# Altium PCB EtherIOv3_2.PcbDoc (part 2 of 2)
Units mil, origin at the board's own origin, x right, y up, seen from the top; angles counter-clockwise.
Board outline 4380 x 2544.37 mil, 2 copper layers (Top Layer, Bottom Layer), stack 63.824 mil thick; 111 components, 138 nets, 525 pads, 210 vias.
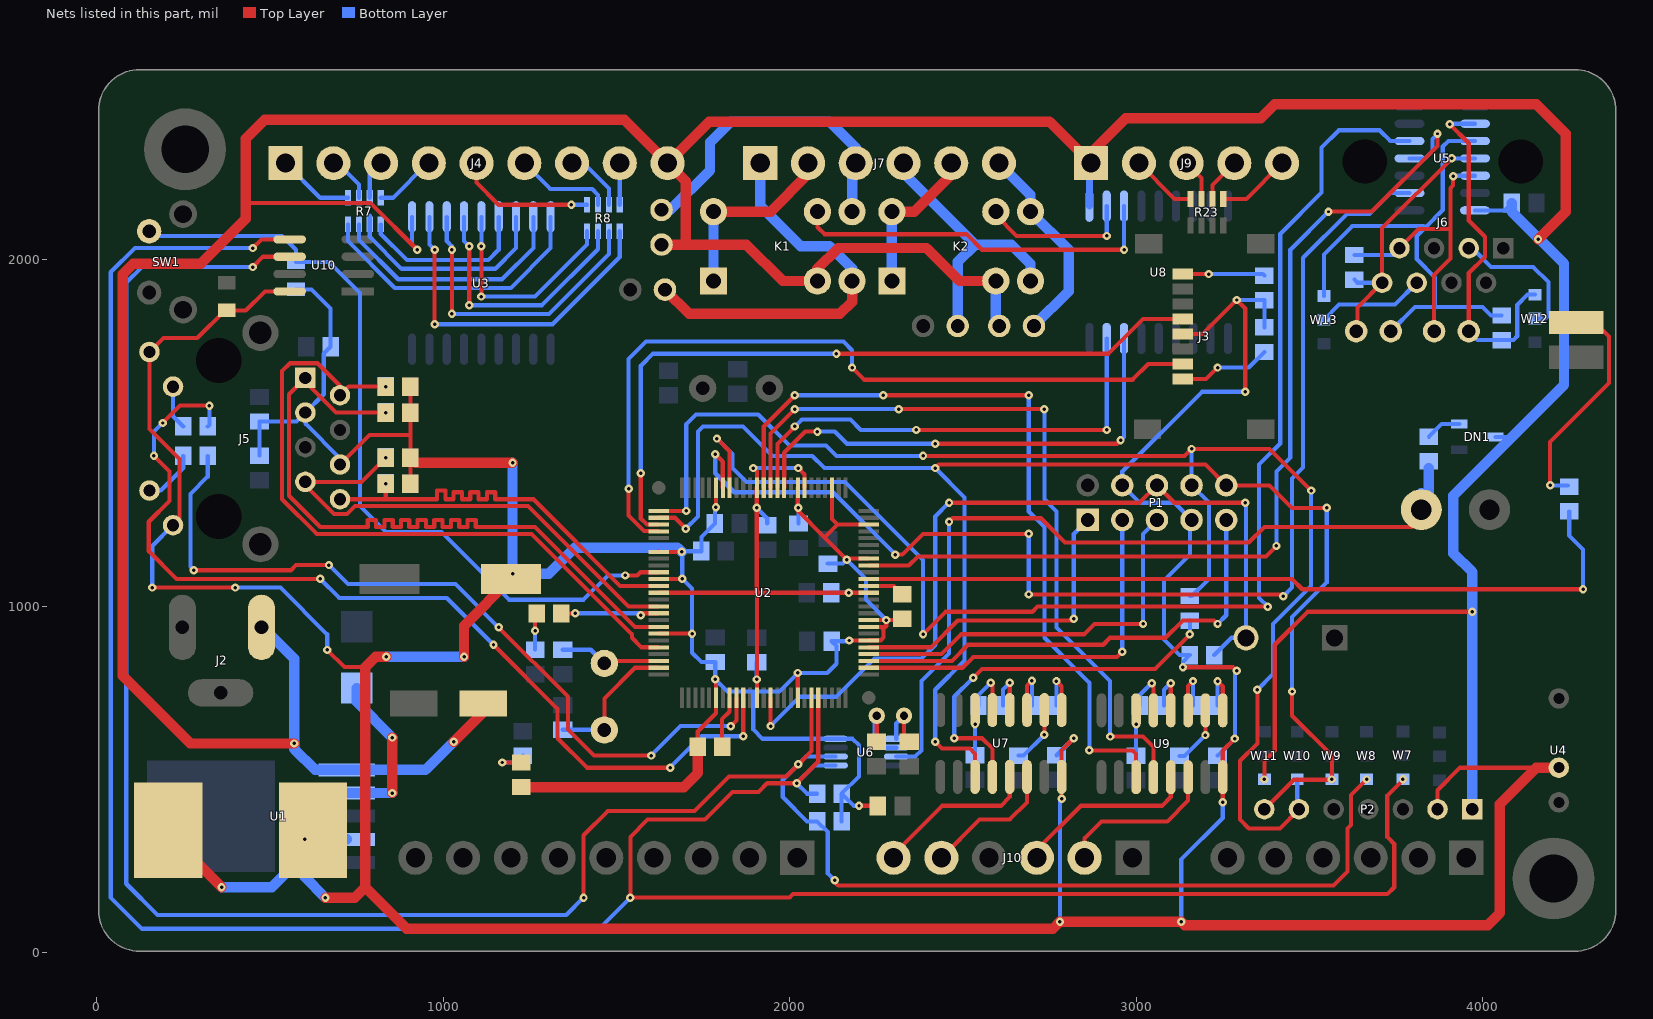
[diagram p2: the nets of this part, all layers, seen from the top]

## Via types
v1: diameter 24, hole 10, Top Layer to Bottom Layer, 202 vias
v2: diameter 24, hole 8, Top Layer to Bottom Layer, 7 vias
v3: diameter 59.06, hole 35.43, Top Layer to Bottom Layer, 1 vias

## Nets (pads, with @x,y where several pads share a name; then routed paths per layer and width w, separated by ;. In a path a pad name is that pad's centre, name@x,y a point inside that pad or via, vN(x,y) a via of type N, cw(c..) or ccw(c..) an arc to the next point about the centre after c; other vN are vias at no path point) (continued)
NetC9_2: C9.2 U2.48 X2.1 | length 296.1
  Top Layer w12: X2.1@1465,835.51 1472.09,842.6 U2.48@1621.85,842.6
  Bottom Layer w12: C9.2@1345,874.88 1425.63,874.88 X2.1@1465,835.51
NetC10_2: C10.2 U2.49 X2.2 | length 404.8
  Top Layer w12: X2.2@1465,643.39 1465,734.45 1553.46,822.91 U2.49@1621.85,822.91
  Bottom Layer w12: C10.2@1345,644.02 1464.37,644.02 X2.2@1465,643.39
NetC20_2: C20.2 C21.2 C22.2 U2.7 U2.14 U2.38 U2.62 U2.88 | length 1624.5
  Top Layer w12: U2.38@1621.85,1039.45 1905,1039.45 ; v1(1895,1399.45) 1905.32,1389.13 U2.14@1905.32,1342.6 1905,1342.28 v1(1905,1284.45) 1905,1039.45 ; U2.62@1905.32,736.3 v1(1905.32,789.13) 1905.32,1039.13 1905,1039.45 ; v1(2025,1399.45) 2043.11,1381.34 U2.7@2043.11,1342.6 ; U2.88@2228.15,1039.45 v1(2170,1039.45) 1905,1039.45
  Bottom Layer w12: v1(1895,1399.45) v1(2025,1399.45) ; v1@1905,789.45 C22.2@1905,838.58 ; v1(1905,1284.45) 1935,1254.45 C21.2@1935,1239.88 ; C20.2@2120,1039.45 v1(2170,1039.45)
NetC24_2: C24.2 R21.2 U6.3 | length 2397.9
  Top Layer w12: v1(2460,1244.45) 2470,1254.45 2725,1254.45 2795,1184.45 3325,1184.45 3370,1229.45 3795,1229.45 3823.15,1257.6 C24.2@3823.15,1279.45
  Bottom Layer w12: U6.3@2307.6,566.65 2362.2,566.65 2380,584.45 2380,784.45 2460,864.45 v1(2460,1244.45)
  Bottom Layer w30: C24.2@3823.15,1327.17 C24.2@3823.15,1279.45 3844.57,1300.87 R21.2@3844.57,1399.45
NetC25_2: C25.2 U6.1 X3.1 | length 156.7
  Top Layer w12: X3.1@2330,684.45 2330,624.88 C25.2@2345,609.88
  Bottom Layer w12: U6.1@2307.6,617.83 2307.6,662.05 X3.1@2330,684.45
NetC26_2: C26.2 U6.2 X3.2 | length 219.5
  Top Layer w12: C26.2@2250,609.88 2251.26,611.14 X3.2@2251.26,684.45
  Bottom Layer w12: X3.2@2251.26,684.45 2245,678.19 2245,614.45 2267.2,592.24 U6.2@2307.6,592.24
NetC29_1: C29.1 U7.3 | length 161.1
  Top Layer w12: U7.3@2685,700.91 2685,771.18 v1(2699.13,785.31)
  Bottom Layer w12: C29.1@2699.13,714.45 v1(2699.13,785.31)
NetC29_2: C29.2 U7.1 | length 159.8
  Top Layer w12: v1(2770,784.45) 2785,769.45 U7.1@2785,700.91
  Bottom Layer w12: C29.2@2770,714.45 v1(2770,784.45)
NetC30_1: C30.1 U7.2 | length 171.3
  Top Layer w12: v1(2735,629.45) U7.2@2735,700.91
  Bottom Layer w12: C30.1@2660,569.45 2675,569.45 v1(2735,629.45)
NetC31_1: C31.1 U7.4 | length 151.5
  Top Layer w12: U7.4@2635,700.91 v1(2635,779.45)
  Bottom Layer w12: C31.1@2615.87,714.45 2615.87,760.31 v1(2635,779.45)
NetC31_2: C31.2 U7.5 | length 160.1
  Top Layer w12: v1(2580,779.45) 2585,774.45 U7.5@2585,700.91
  Bottom Layer w12: C31.2@2545,714.45 2545,744.45 v1(2580,779.45)
NetC32_1: C32.1 U7.6 | length 130.6
  Top Layer w12: v1(2535,659.45) U7.6@2535,700.91
  Bottom Layer w12: C32.1@2535,570.31 v1(2535,659.45)
NetC34_1: C34.1 U9.3 | length 161.1
  Top Layer w12: U9.3@3150,700.04 3150,770.31 v1(3164.13,784.45)
  Bottom Layer w12: C34.1@3164.13,713.58 v1(3164.13,784.45)
NetC34_2: C34.2 U9.1 | length 159.8
  Top Layer w12: v1(3235,783.58) 3250,768.58 U9.1@3250,700.04
  Bottom Layer w12: C34.2@3235,713.58 v1(3235,783.58)
NetC35_1: C35.1 U9.2 | length 171.3
  Top Layer w12: v1(3200,628.58) U9.2@3200,700.04
  Bottom Layer w12: C35.1@3125,568.58 3140,568.58 v1(3200,628.58)
NetC36_1: C36.1 U9.4 | length 151.5
  Top Layer w12: U9.4@3100,700.04 v1(3100,778.58)
  Bottom Layer w12: C36.1@3080.87,713.58 3080.87,759.45 v1(3100,778.58)
NetC36_2: C36.2 U9.5 | length 160.1
  Top Layer w12: v1(3045,778.58) 3050,773.58 U9.5@3050,700.04
  Bottom Layer w12: C36.2@3010,713.58 3010,743.58 v1(3045,778.58)
NetC37_1: C37.1 U9.6 | length 130.6
  Top Layer w12: v1(3000,659.45) U9.6@3000,700.04
  Bottom Layer w12: C37.1@3000,569.45 v1(3000,659.45)
NetD1_2: D1.2 R1.2 | length 123.1
  Top Layer w12: v1(1170,549.45) D1.2@1225,549.45
  Bottom Layer w12: v1(1170,549.45) 1210.43,549.45 R1.2@1230,569.02
NetD2_2: D2.2 L1.1 U1.2 | length 1279.7
  Top Layer w30: L1.1@206.34,354.45 206.34,343.11 v1(360,189.45) ; v1(853.07,461.38) v1(853.07,621.38)
  Bottom Layer w30: v1(360,189.45) 505,189.45 550,234.45 550,404.45 606.93,461.38 U1.2@721.06,461.38 v1(853.07,461.38) ; D2.2@750,764.45 750,724.45 v1(853.07,621.38)
NetD3_A: D3.A R24.1 | length 662.9
  Top Layer w12: v1(4195,1349.45) 4195,1474.45 4365,1644.45 4365,1779.45 4325,1819.45 D3.A@4270,1819.45
  Bottom Layer w12: v1(4195,1349.45) R24.1@4245.87,1349.45
NetDN1_K: DN1.K R21.1 | length 103.1
  Bottom Layer w12: R21.1@3845,1489.88 3881.97,1526.85 DN1.K@3932.76,1526.85
NetJ3_1: J3.1 R2.1 | length 267.4
  Top Layer w12: J3.1@3135,1656.14 3201.69,1656.14 v1(3235,1689.45)
  Bottom Layer w12: v1(3235,1689.45) 3325,1689.45 R2.1@3370,1734.45
NetJ3_8: J3.8 R5.1 | length 236.8
  Top Layer w12: J3.8@3135,1959.29 v1(3209.84,1959.29)
  Bottom Layer w12: v1(3209.84,1959.29) 3365.59,1959.29 R5.1@3370,1954.88
NetJ4_1: J4.1 R7.1 | length 221.4
  Bottom Layer w12: J4.1@545,2279.45 645,2179.45 R7.1@725,2179.45
NetJ4_2: J4.2 R7.2 | length 137.7
  Bottom Layer w12: J4.2@682.8,2279.45 695,2279.45 756.5,2217.95 R7.2@756.5,2179.45
NetJ4_3: J4.3 R7.3 | length 113.5
  Bottom Layer w12: R7.3@787.99,2179.45 787.99,2246.85 J4.3@820.59,2279.45
NetJ4_4: J4.4 R7.4 | length 216.9
  Bottom Layer w12: R7.4@819.49,2179.45 855,2179.45 955,2279.45 J4.4@958.39,2279.45 J4.4@995,2279.45
NetJ4_5: J4.5 R8.1 | length 401.4
  Top Layer w12: J4.5@1096.18,2279.45 1096.18,2223.27 1160,2159.45 v1(1370,2159.45)
  Bottom Layer w12: v1(1370,2159.45) R8.1@1415,2159.45
NetJ4_6: J4.6 R8.2 | length 297.3
  Bottom Layer w12: J4.6@1233.98,2279.45 1308.98,2204.45 1430,2204.45 1446.5,2187.95 R8.2@1446.5,2159.45 R8.2@1446.5,2177.83
NetJ4_7: J4.7 R8.3 | length 183.5
  Bottom Layer w12: J4.7@1371.77,2279.45 1405,2279.45 1477.99,2206.46 R8.3@1477.99,2159.45
NetJ4_8: J4.8 R8.4 | length 120
  Bottom Layer w12: R8.4@1509.49,2159.45 1509.49,2279.37 J4.8@1509.57,2279.45
NetJ5_P10: J5.P10 R10.2 | length 127.2
  Bottom Layer w12: J5.P10@220,1634.45 220,1549.02 R10.2@249.57,1519.45
NetJ5_P11: J5.P11 R9.2 | length 159.7
  Bottom Layer w12: J5.P11@152,1334.45 184.57,1334.45 249.57,1399.45 249.57,1434.02 R9.2@249.13,1434.45
NetJ6_3: J6.3 W12.2 | length 409.4
  Bottom Layer w12: J6.3@3960,2034.21 3970.14,2034.21 4024.36,1980 4146,1980 4190,1936 4190,1840 4181.05,1831.05 W12.2@4151,1831.05
NetJ6_6: J6.6 W13.2 | length 312.4
  Bottom Layer w12: W13.2@3542,1827.05 3585.95,1871 3746.79,1871 J6.6@3810,1934.21
NetJ7_1: J7.1 K1.NC W4.1 | length 1141.7
  Top Layer w30: W4.1@1640,1914.45 1710,1844.45 2145,1844.45 2180,1879.45 K1.NC@2180,1939.45
  Bottom Layer w30: J7.1@1915,2279.45 1915,2156.77 2032.33,2039.45 2115,2039.45 2180,1974.45 K1.NC@2180,1939.45
NetJ7_2: J7.2 K1.COM1 K1.COM2 | length 549.7
  Top Layer w30: K1.COM2@1780,2139.45 1945,2139.45 2052.8,2247.24 J7.2@2052.8,2279.45
  Bottom Layer w30: K1.COM1@1780,1939.45 K1.COM2@1780,2139.45
NetJ7_3: J7.3 K1.NO W3.1 | length 953.2
  Bottom Layer w30: W3.1@1630,2144.45 1655,2144.45 1770,2259.45 1770,2339.45 1830,2399.45 2115,2399.45 2190.59,2323.86 J7.3@2190.59,2279.45 2180,2268.86 K1.NO@2180,2139.45 K1.NO@2180,2119.45
NetJ7_4: J7.4 K2.NC W5.1 | length 809.1
  Bottom Layer w30: J7.4@2328.39,2279.45 2328.39,2251.06 2535,2044.45 ; W5.1@2485,1809.45 2485,1994.45 2535,2044.45 ; K2.NC@2695,1939.45 2695,1989.45 2640,2044.45 2535,2044.45
NetJ7_5: J7.5 K2.COM1 K2.COM2 | length 449
  Top Layer w30: K2.COM2@2295,2139.45 2360,2139.45 2466.18,2245.63 J7.5@2466.18,2279.45
  Bottom Layer w30: K2.COM1@2295,1939.45 K2.COM2@2295,2139.45
NetJ7_6: J7.6 K2.NO W6.1 | length 594.7
  Bottom Layer w30: J7.6@2603.98,2279.45 2695,2188.43 K2.NO@2695,2139.45 2805,2029.45 2805,1909.45 W6.1@2705,1809.45
NetJ9_2: J9.2 R23.4 | length 192
  Top Layer w12: J9.2@3007.8,2279.45 3111.02,2176.22 R23.4@3157.01,2176.22
NetJ9_3: J9.3 R23.3 | length 121
  Top Layer w12: J9.3@3145.59,2279.45 3188.5,2236.54 R23.3@3188.5,2176.22
NetJ9_4: J9.4 R23.2 | length 129.5
  Top Layer w12: R23.2@3220,2176.22 3220,2216.06 J9.4@3283.39,2279.45
NetJ9_5: J9.5 R23.1 | length 212.4
  Top Layer w12: R23.1@3251.5,2176.22 3317.95,2176.22 J9.5@3421.18,2279.45
NetK1_COIL2: K1.COIL2 U8.12 | length 1082.9
  Top Layer w12: K1.COIL2@2080,2139.45 2080,2094.45 2100,2074.45 2510,2074.45 2555,2029.45 v1(2965,2029.45)
  Bottom Layer w12: v1(2965,2029.45) U8.12@2965,2155.39
NetK2_COIL2: K2.COIL2 U8.11 | length 440.8
  Top Layer w12: K2.COIL2@2595,2139.45 2595,2129.45 2655,2069.45 v1(2915,2069.45)
  Bottom Layer w12: v1(2915,2069.45) U8.11@2915,2155.39
NetR7_5: R7.5 U3.15 | length 506.9
  Bottom Layer w12: R7.5@819.49,2102.68 819.49,2074.96 895,1999.45 1130,1999.45 1160,2029.45 U3.15@1160,2124.45
NetR7_6: R7.6 U3.16 | length 636
  Bottom Layer w12: 787.99,2127.44 R7.6@787.99,2102.68 787.99,2066.46 880,1974.45 1150,1974.45 1210,2034.45 U3.16@1210,2124.45
NetR7_7: R7.7 U3.17 | length 722.5
  Bottom Layer w12: R7.7@756.5,2102.68 756.5,2057.95 870,1944.45 1170,1944.45 1260,2034.45 U3.17@1260,2124.45
NetR7_8: R7.8 U3.18 | length 826.8
  Bottom Layer w12: R7.8@725,2102.68 725,2054.45 860,1919.45 1195,1919.45 1310,2034.45 U3.18@1310,2124.45
NetR8_5: R8.5 U3.11 | length 1005
  Top Layer w12: v1(975,1814.45) v1(975,2029.45)
  Bottom Layer w12: U3.11@960,2124.45 960,2044.45 v1(975,2029.45) ; v1(975,1814.45) 1315,1814.45 1509.49,2008.94 R8.5@1509.49,2082.68
NetR8_6: R8.6 U3.12 | length 876.1
  Top Layer w12: v1(1025,1844.45) v1(1025,2029.45)
  Bottom Layer w12: U3.12@1010,2124.45 1010,2054.45 1025,2039.45 v1(1025,2029.45) ; v1(1025,1844.45) 1305,1844.45 1477.99,2017.44 R8.6@1477.99,2082.68
NetR8_7: R8.7 U3.13 | length 751.3
  Top Layer w12: v1(1075,1869.45) v1(1075,2039.45)
  Bottom Layer w12: U3.13@1060,2124.45 1060,2054.45 v1(1075,2039.45) ; v1(1075,1869.45) 1285,1869.45 1446.5,2030.94 R8.7@1446.5,2082.68
NetR8_8: R8.8 U3.14 | length 635.4
  Top Layer w12: v1(1110,1894.45) v1(1110,2039.45)
  Bottom Layer w12: v1(1110,1894.45) 1265,1894.45 1415,2044.45 R8.8@1415,2082.68 ; v1(1110,2039.45) U3.14@1110,2124.45
NetR9_1: R9.1 U2.59 | length 2318.3
  Top Layer w12: v1(280,1104.45) 560,1104.45 575,1119.45 v1(670,1119.45) ; v1(1160,939.45) 1360,739.45 1360,644.45 1435,569.45 v1(1600,569.45) ; v1(1830,654.45) 1846.26,670.71 U2.59@1846.26,736.3
  Bottom Layer w12: v1(280,1104.45) 270,1114.45 270,1324.45 320,1374.45 R9.1@320,1434.45 ; v1(670,1119.45) 725,1064.45 1035,1064.45 v1(1160,939.45) ; v1(1600,569.45) 1685,654.45 v1(1830,654.45)
NetR10_1: R10.1 U2.60 | length 2814.6
  Top Layer w12: v1(165,1434.45) 210,1389.45 210,1304.45 150,1244.45 150,1159.45 230,1079.45 v1(645,1079.45) ; v1(190,1529.45) 240,1579.45 v1(325,1579.45) ; v1(1145,889.45) 1330,704.45 1330,619.45 1415,534.45 v1(1655,534.45) ; v1(1865.94,625.39) U2.60@1865.94,736.3
  Bottom Layer w12: v1(165,1434.45) 165,1504.45 v1(190,1529.45) ; R10.1@320.43,1519.45 325,1524.02 v1(325,1579.45) ; v1(645,1079.45) 700,1024.45 1010,1024.45 v1(1145,889.45) ; v1(1655,534.45) 1745.94,625.39 v1(1865.94,625.39)
NetR11_1: R11.1 U2.58 | length 150.4
  Top Layer w12: R11.1@1805,594.88 1805,674.45 1826.57,696.02 U2.58@1826.57,736.3
NetR14_2: R14.2 R15.1 | length 106
  Top Layer w12: v1(1265,929.45) 1265,974.88 R15.1@1269.57,979.45
  Bottom Layer w12: R14.2@1265,875.31 v1(1265,929.45)
NetR15_2: R15.2 U2.41 | length 298.4
  Top Layer w12: R15.2@1341.38,980.39 R15.2@1340.43,979.45 1380,979.45 v1(1380.94,980.39) ; v1(1570,974.45) 1570,976.34 1574.06,980.39 U2.41@1621.85,980.39
  Bottom Layer w12: v1(1380.94,980.39) 1574.06,980.39 1570,976.34 v1(1570,974.45)
NetR22_2: R22.2 U7.12 | length 1118
  Top Layer w12: v1(2475,619.45) 2555,619.45 2585,589.45 U7.12@2585,507.99 ; v1(2530,794.45) 2555,819.45 3055,819.45 v1(3155,919.45)
  Bottom Layer w12: v1(2475,619.45) 2475,739.45 v1(2530,794.45) ; v1(3155,919.45) R22.2@3155,959.02
R\S\T\: P1.6 R16.1 S1.2 U2.64 | length 2480.2
  Top Layer w12: v1(1944.68,654.76) U2.64@1944.68,736.3 ; v1(2460,1299.45) 3010,1299.45 P1.6@3060,1349.45 3110,1299.45 v1(3315,1299.45)
  Bottom Layer w12: v1(1944.68,654.76) 2029.37,739.45 2135,739.45 2245,849.45 2380,849.45 2420,889.45 2420,1259.45 v1(2460,1299.45) ; R16.1@3225.43,859.45 3275.43,909.45 S1.2@3317.05,909.45 3317.05,1297.4 v1(3315,1299.45)
REL0: U2.10 U8.7 | length 1413.9
  Top Layer w12: U2.10@1984.06,1342.6 1984.06,1443.5 2045,1504.45 v1(2080,1504.45) ; v1(2420,1469.45) 2945,1469.45 v1(2955,1479.45)
  Bottom Layer w12: v1(2080,1504.45) 2130,1504.45 2165,1469.45 v1(2420,1469.45) ; v1(2955,1479.45) 2965,1489.45 U8.7@2965,1773.5
REL1: U2.11 U8.8 | length 1382.6
  Top Layer w12: U2.11@1964.37,1342.6 1964.37,1468.82 v1(2015,1519.45) ; v1(2365,1509.45) 2835,1509.45 v1(2915,1509.45)
  Bottom Layer w12: v1(2015,1519.45) 2035,1539.45 2175,1539.45 2205,1509.45 v1(2365,1509.45) ; v1(2915,1509.45) U8.8@2915,1773.5
"RS485 DE": U2.92 U5.4 | length 2786.8
  Top Layer w12: U2.92@2228.15,1118.19 2343.74,1118.19 2370,1144.45 3375,1144.45 v1(3405,1174.45) ; v2(3555,2139.45) 3680,2139.45 3870,2329.45 v2(3870,2364.45)
  Bottom Layer w12: v1(3405,1174.45) 3405,1389.45 3445,1429.45 3445,2029.45 v2(3555,2139.45) ; U5.4@3789.13,2293.27 3833.82,2293.27 3855,2314.45 3855,2349.45 v2(3870,2364.45)
RX+: J6.7 R19.2 U5.12 W2.2 | length 842.2
  Top Layer w12: J6.7@3760,2034.21 3814.79,2089 3907,2089 ; W2.2@3860,1794.21 3860,1957 3907,2004 3907,2207 3914.92,2214.92 v1(3914.92,2241.97)
  Bottom Layer w12: R19.2@3630,2014.21 3740,2014.21 J6.7@3760,2034.21 ; v1(3914.92,2241.97) 3916.22,2243.27 U5.12@3978.11,2243.27
RX-: J6.8 R19.1 U5.11 W1.2 | length 794
  Top Layer w12: W1.2@3635,1794.21 3658.43,1794.21 3638.89,1813.74 3638.89,1863.11 J6.8@3710,1934.21 3710,2092.05 v1(3911.22,2293.27)
  Bottom Layer w12: R19.1@3630,1943.35 3639.13,1934.21 J6.8@3710,1934.21 ; v1(3911.22,2293.27) U5.11@3978.11,2293.27
RXIN: C7.1 J5.P8 R17.1 U2.37 | length 1238.9
  Top Layer w12: J5.P8@702,1309.45 835,1309.45 ; v1(834.13,1354.45) 834.13,1310.31 835,1309.45 ; U2.37@1621.85,1059.13 1510.32,1059.13 1260,1309.45 1150,1309.45 1150,1329.45 1126,1329.45 1126,1309.45 1102,1309.45 1102,1329.45 1078,1329.45 1078,1309.45 1054,1309.45 1054,1329.45 1030,1329.45 1030,1309.45 1006,1309.45 1006,1334.45 982,1334.45 982,1309.45 835,1309.45
RXIP: C8.1 J5.P7 R18.1 U2.40 | length 1454.4
  Top Layer w12: v1(834.13,1429.45) 764.13,1359.45 J5.P7@602,1359.45 602,1349.31 684.38,1266.92 722.47,1266.92 745,1289.45 1245,1289.45 1534.37,1000.08 U2.40@1621.85,1000.08
SCK: J3.5 U2.28 | length 2120.5
  Top Layer w12: v1(1570,1384.45) 1570,1254.02 1587.72,1236.3 U2.28@1621.85,1236.3 ; v1(2135,1729.45) 2920,1729.45 3019.92,1829.37 J3.5@3135,1829.37
  Bottom Layer w12: v1(1570,1384.45) 1570,1694.45 1605,1729.45 v1(2135,1729.45)
SCL: R3.1 U2.70 U6.6 U10.6 W8.3 | length 7037.1
  Top Layer w12: v1(450,1979.45) 480,2009.45 U10.6@556.57,2009.45 ; v1@1405,169.45 1405,339.45 1475,409.45 1725,409.45 1825,509.45 1990,509.45 v1(2025,544.45) 2062.8,582.24 U2.70@2062.8,736.3 ; v1@2130,204.45 2140,194.45 3570,194.45 3610,234.45 3610,359.45 3620,369.45 3620,455.55 v1(3665,500.55)
  Bottom Layer w12: v1(450,1979.45) 130,1979.45 85,1934.45 85,199.45 175,109.45 1355,109.45 v1(1405,159.45) ; v1(2130,209.45) 2110,229.45 2110,348.58 R3.1@2079.13,379.45 2050,379.45 1980,449.45 1980,499.45 v1(2025,544.45) 2047.2,566.65 U6.6@2132.4,566.65
"SD S\S\": J3.2 U2.29 | length 2272.2
  Top Layer w12: v1(1535,1339.45) 1535,1262.15 1579.85,1217.3 1621.17,1217.3 U2.29@1621.85,1216.61 ; v1(2180,1689.45) 2215,1654.45 2990,1654.45 3035,1699.45 J3.2@3135,1699.45
  Bottom Layer w12: v1(1535,1339.45) 1535,1714.45 1585,1764.45 2155,1764.45 2180,1739.45 v1(2180,1689.45)
SDA: R4.1 U2.71 U6.5 U10.5 W7.3 | length 7688.8
  Top Layer w12: v1(450,2034.45) 475,2059.45 U10.5@556.57,2059.45 ; U2.71@2082.48,736.3 2082.48,551.93 v1(2020,489.45) 1935,489.45 1910,464.45 1835,464.45 1755,384.45 1590,384.45 1540,334.45 v1(1540,159.45) 2000,159.45 2010,169.45 3725,169.45 3745,189.45 3745,314.45 3725,334.45 3725,454.45 3770,499.45 v1(3770,501.1)
  Bottom Layer w12: v1(450,2034.45) 110,2034.45 40,1964.45 40,159.45 130,69.45 1450,69.45 v1(1540,159.45) ; R4.1@2079.13,459.45 2050,459.45 v1(2020,489.45) 2071.61,541.06 U6.5@2132.4,541.06
STAT: R24.2 U2.90 | length 2315.6
  Top Layer w12: U2.90@2228.15,1078.82 3450,1078.82 3479.37,1049.45 v1(4290,1049.45)
  Bottom Layer w12: R24.2@4250,1274.45 4250,1204.45 4290,1164.45 v1(4290,1049.45)
T\R\S\T\: R6.1 U2.89 | length 106.9
  Top Layer w12: U2.89@2228.15,1059.13 2300.75,1059.13 R6.1@2325,1034.88
TCK: P1.1 U2.80 | length 927.6
  Top Layer w12: U2.80@2228.15,881.97 2407.52,881.97 2485,959.45 2815,959.45 v1(2820,964.45)
  Bottom Layer w12: v1(2820,964.45) 2820,1209.45 P1.1@2860,1249.45
TDI: P1.9 U2.78 | length 1369.7
  Top Layer w12: U2.78@2228.15,842.6 2468.15,842.6 2515,889.45 2905,889.45 2925,909.45 3085,909.45 3135,959.45 3225,959.45 v1(3235,949.45)
  Bottom Layer w12: v1(3235,949.45) 3260,974.45 P1.9@3260,1249.45
TDO: P1.3 U2.77 | length 1131.1
  Top Layer w12: U2.77@2228.15,822.91 2498.46,822.91 2530,854.45 2945,854.45 v1(2960,869.45)
  Bottom Layer w12: v1(2960,869.45) P1.3@2960,1249.45
TMS: P1.5 U2.79 | length 1144.5
  Top Layer w12: U2.79@2228.15,862.28 2437.83,862.28 2495,919.45 2850,919.45 2880,949.45 v1(3020,949.45)
  Bottom Layer w12: v1(3020,949.45) 3020,1209.45 P1.5@3060,1249.45
TX+: R20.1 U5.9 W2.1 W12.1 | length 1041.8
  Top Layer w12: v1(3904.92,2391.97) 3960,2336.89 3960,2114 4007,2067 4007,2009 3960,1962 W2.1@3960,1794.21
  Bottom Layer w12: v1(3904.92,2391.97) 3906.22,2393.27 U5.9@3978.11,2393.27 ; W2.1@3960,1794.21 3985.43,1768.78 R20.1@4055,1768.78 4088.78,1768.78 4100,1780 4100,1870 4129.94,1899.94 W12.1@4151,1899.94
TX-: R20.2 U5.10 W1.1 W13.1 | length 1423.2
  Bottom Layer w12: W13.1@3542,1895.94 3542,2016 3624,2098 3830,2098 3833.78,2094.22 3834.78,2094.22 ; W1.1@3735,1794.21 3805,1864.21 3863,1864.21 ; U5.10@3978.11,2343.27 3901.22,2343.27 3885,2327.05 3885,2144.45 3834.78,2094.22 ; R20.2@4055,1839.65 4024.57,1839.65 4000,1864.21 3863,1864.21 ; 3834.78,2094.22 3810,2069.45 3810,2003 3863,1950 3863,1864.21
TXON: C4.1 J5.P2 R13.1 U2.46 | length 2013
  Top Layer w12: v1(834.13,1634.45) 727,1634.45 J5.P2@702,1609.45 702,1636.89 636.91,1701.98 557.53,1701.98 535,1679.45 535,1309.45 635,1209.45 1255,1209.45 1545,919.45 1545,909.45 1572.48,881.97 U2.46@1621.85,881.97
TXOP: C3.1 J5.P1 R12.1 U2.43 | length 2143.7
  Top Layer w12: v1(834.13,1559.45) 690,1559.45 602,1647.45 J5.P1@602,1659.45 555,1612.45 555,1319.45 645,1229.45 782,1229.45 782,1249.45 806,1249.45 806,1229.45 830,1229.45 830,1249.45 854,1249.45 854,1229.45 878,1229.45 878,1249.45 902,1249.45 902,1229.45 926,1229.45 926,1249.45 950,1249.45 950,1229.45 974,1229.45 974,1249.45 998,1249.45 998,1229.45 1022,1229.45 1022,1249.45 1046,1249.45 1046,1229.45 1070,1229.45 1070,1249.45 1094,1249.45 1094,1229.45 1265,1229.45 1553.43,941.02 U2.43@1621.85,941.02
U0RX: P1.8 P2.6 R22.1 U2.26 W10.3 | length 4064.4
  Top Layer w12: U2.26@1621.85,1275.67 v1(1701.22,1275.67) ; v1(2385,1434.45) 3140,1434.45 v1(3160,1454.45) 3385,1454.45 v1(3505,1334.45) ; v1(3350,759.45) 3350,604.45 3300,554.45 3300,384.45 3325,359.45 3415,359.45 P2.6@3470,414.45
  Bottom Layer w12: v1(1701.22,1275.67) 1701.22,1525.67 1730,1554.45 1909.17,1554.45 1999.17,1464.45 2105,1464.45 2135,1434.45 v1(2385,1434.45) ; R22.1@3155,1029.88 3160.43,1029.88 3210,1079.45 3210,1299.45 P1.8@3160,1349.45 v1(3160,1454.45) ; v1(3350,759.45) 3395,804.45 3395,949.45 3505,1059.45 v1(3505,1334.45) ; W10.3@3465,500.55 3465,419.45 P2.6@3470,414.45 P2.6@3480,424.45
U0RXH: J10.6 U7.13 | length 520.4
  Top Layer w12: J10.6@2300,274.45 2300,284.45 2440,424.45 2610,424.45 2635,449.45 U7.13@2635,507.99 U7.13@2635,459.45
U0TX: P1.10 P2.7 U2.27 U7.11 W9.3 | length 4480.3
  Top Layer w12: U2.27@1621.85,1255.98 1668.46,1255.98 v1(1700,1224.45) ; v1(2420,609.45) 2440,589.45 2520,589.45 2535,574.45 U7.11@2535,507.99 ; v1(2420,1399.45) 2430,1409.45 3200,1409.45 P1.10@3260,1349.45 3385,1349.45 3450,1284.45 v1(3550,1284.45) ; P2.7@3370,414.45 3455,499.45 3565,499.45 3565,569.45 3450,684.45 v1(3450,754.45)
  Bottom Layer w12: v1(1700,1224.45) 1735,1259.45 1735,1504.45 1750,1519.45 1865,1519.45 1950,1434.45 2065,1434.45 2100,1399.45 v1(2420,1399.45) 2505,1314.45 2505,844.45 2420,759.45 v1(2420,609.45) ; v1(3450,754.45) 3450,969.45 3550,1069.45 v1(3550,1284.45) ; v1(3565,500.55) W9.3@3570,495.55
U0TXH: J10.5 U7.14 | length 387
  Top Layer w12: J10.5@2437.8,274.45 2547.8,384.45 2635,384.45 2685,434.45 U7.14@2685,507.99
U1RX: U2.12 U9.12 | length 2224.4
  Top Layer w12: U2.12@1944.68,1342.6 1944.68,1499.13 v1(2015,1569.45) ; v1(2315,1569.45) v1(2735,1569.45) ; v1(2925,624.45) 3020,624.45 3050,594.45 U9.12@3050,507.13
  Bottom Layer w12: v1(2015,1569.45) v1(2315,1569.45) ; v1(2735,1569.45) 2735,1309.45 2770,1274.45 2770,939.45 2925,784.45 v1(2925,624.45)
U1RXH: J10.3 U9.13 | length 530.5
  Top Layer w12: J10.3@2713.39,274.45 2713.39,297.83 2840,424.45 3075,424.45 3100,449.45 U9.13@3100,507.13
U1TX: U2.13 U9.11 | length 2283.1
  Top Layer w12: U2.13@1925,1342.6 1925,1519.45 v1(2015,1609.45) ; v1(2270,1609.45) v1(2690,1609.45) ; v1(2865,584.45) 2990,584.45 3000,574.45 U9.11@3000,507.13
  Bottom Layer w12: v1(2015,1609.45) v1(2270,1609.45) ; v1(2690,1609.45) 2690,1274.45 2735,1229.45 2735,909.45 2865,779.45 v1(2865,584.45)
U1TXH: J10.2 U9.14 | length 467.8
  Top Layer w12: J10.2@2851.18,274.45 2851.18,330.63 2900,379.45 3090,379.45 3150,439.45 U9.14@3150,507.13
U2RX: U2.19 U5.2 | length 3485.3
  Top Layer w12: v1(1785,1439.45) 1806.89,1417.56 U2.19@1806.89,1342.6 ; v1(2305,1149.45) 2325,1149.45 2385,1209.45 v1(2690,1209.45) ; v1(2690,1034.45) 3420,1034.45 v1(3425,1029.45)
  Bottom Layer w12: v1(1785,1439.45) 1785,1384.45 1840,1329.45 2125,1329.45 v1(2305,1149.45) ; v1(2690,1034.45) v1(2690,1209.45) ; v1(3425,1029.45) 3450,1054.45 3450,1369.45 3482,1401.45 3482,2006.45 3608.82,2133.27 3673.62,2133.27 3733.62,2193.27 U5.2@3789.13,2193.27
U2TX: U2.18 U5.5 | length 3861.2
  Top Layer w12: v1(1790,1484.45) 1826.57,1447.87 U2.18@1826.57,1342.6 ; v1(2385,919.45) 2450,984.45 2700,984.45 2715,999.45 v1(3380,999.45)
  Bottom Layer w12: v1(1790,1484.45) 1835,1439.45 1835,1399.45 1875,1359.45 2160,1359.45 2385,1134.45 v1(2385,919.45) ; v1(3380,999.45) 3355,1024.45 3355,1409.45 3416,1470.45 3416,2075.45 3535,2194.45 3535,2324.45 3585,2374.45 3702.44,2374.45 3733.62,2343.27 U5.5@3789.13,2343.27
USER_BUTTON: R25.2 SW1.2 U2.35 | length 2325.2
  Top Layer w12: v1(1525,1089.45) 1560,1089.45 1569.06,1098.5 U2.35@1621.85,1098.5
  Bottom Layer w12: SW1.2@151,2082.95 164.5,2069.45 535,2069.45 575,2029.45 R25.2@575,1993.82 670.63,1993.82 760,1904.45 760,1289.45 835,1214.45 995,1214.45 1190,1019.45 1405,1019.45 1475,1089.45 v1(1525,1089.45)
VCC3.3V: C2.2 C11.2 C12.1 C13.1 C14.2 C15.2 C16.2 C17.2 C18.2 C19.2 C27.1 C28.1 C33.1 C38.1 D1.1 J3.4 J5.P3 J5.P6 J5.P9 J5.P12 L1.2 P1.4 P1.7 P2.2 R2.2 R3.2 R4.2 R5.2 R6.2 R11.2 R12.2 R13.2 R16.2 R17.2 R18.2 R25.1 U1.4 U2.3 U2.8 U2.20 U2.32 U2.36 U2.44 U2.56 U2.68 U2.81 U2.83 U2.84 U2.93 U2.98 U4.2 U6.8 U7.16 U9.16 U10.8 | length 18252.2
  Top Layer w12: v1(160,1054.45) v1(400,1054.45) ; J5.P12@220,1234.45 239,1253.45 239,1425.45 152,1512.45 J5.P9@152,1734.45 192,1774.45 290,1774.45 370,1854.45 430,1854.45 485,1909.45 U10.8@556.57,1909.45 ; v1(665,874.45) 714.8,824.65 775,824.65 ; J5.P6@702,1409.45 787,1494.45 905,1494.45 ; R17.2@905,1354.45 R18.2@905,1429.45 905,1494.45 ; R13.2@905,1634.45 R12.2@905,1559.45 905,1494.45 ; U2.32@1621.07,1158.34 U2.32@1621.85,1157.56 v1(1688.11,1157.56) ; U2.44@1621.85,921.34 v1(1718.11,921.34) ; U2.36@1621.85,1078.82 1689.37,1078.82 v1(1690,1079.45) ; R11.2@1734.57,594.45 1734.57,639.02 1787.2,691.65 U2.56@1787.2,736.3 v1@1787.2,787.24 ; v1(1787.2,1286.65) U2.20@1787.2,1342.6 ; U2.68@2023.43,736.3 v1(2023.43,807.87) ; U2.8@2023.43,1342.6 v1@2023.43,1286.02 ; v1(2025,1284.45) v1@2023.43,1286.02 ; U2.3@2121.85,1342.6 2121.85,1252.13 2137.68,1236.3 ; v1(2172.2,901.65) U2.81@2228.15,901.65 2228.83,902.34 2262.97,902.34 2270.68,910.05 2270.68,932.63 2262.97,940.34 ; v1(2200,424.45) C27.1@2254.57,424.45 ; U2.84@2228.15,960.71 v1(2278.74,960.71) ; U2.93@2228.15,1137.87 2168.43,1137.87 v1(2165,1134.45) 2100.41,1199.03 ; U2.98@2228.15,1236.3 2137.68,1236.3 ; U2.83@2228.83,940.34 U2.83@2228.15,941.02 2276.57,941.02 2278.74,943.19 v1(2278.74,960.71) ; R6.2@2330,960.71 v1(2278.74,960.71) ; v1(2785,444.45) U7.16@2785,507.99 2785,584.45 v1(2820,619.45) ; v1(3135,824.45) 3280,824.45 ; J3.4@3135,1786.06 3191.61,1786.06 v1(3290,1884.45) 3315,1859.45 v1(3315,1619.45) ; v1(3250,434.45) U9.16@3250,507.13 3250,583.58 v1(3285,618.58) ; P2.2@3870,414.45 3870,469.45 3935,534.45 4155,534.45 ; v1@2023.43,1286.02 2023.43,1276.02 2100.41,1199.03 ; 2100.41,1199.03 2137.68,1236.3
  Top Layer w30: v1(660,159.45) 745,159.45 775,189.45 ; v1(835,854.45) 804.8,854.45 775,824.65 775,189.45 ; R18.2@905,1429.45 920,1414.45 v1(1200,1414.45) ; v1(1060,854.45) 1060,944.25 C2.2@1195.2,1079.45 ; D1.1@1225,478.58 1694.13,478.58 1734.57,519.02 R11.2@1734.57,594.45 ; U4.2@4220,534.45 4155,534.45 4050,429.45 4050,115 4014.45,79.45 3140,79.45 v1(3130,89.45) v1(2780,89.45) 2760,69.45 895,69.45 775,189.45
  Bottom Layer w12: v1(160,1054.45) 160,1174.45 J5.P12@220,1234.45 ; v1(400,1054.45) 530,1054.45 665,919.45 v1(665,874.45) ; C12.1@470,1435.31 C11.2@470,1533.58 576.13,1533.58 J5.P3@602,1559.45 ; R25.1@575,1915.08 619.37,1915.08 675,1859.45 C13.1@675,1749.45 655,1729.45 655,1612.45 J5.P3@602,1559.45 ; J5.P6@702,1409.45 702,1427.45 602,1527.45 J5.P3@602,1559.45 ; v1(1787.2,1286.65) 1784.13,1283.58 C17.2@1784.13,1239.45 1745,1200.31 C19.2@1745,1159.45 1690,1159.45 v1(1688.11,1157.56) 1690,1155.67 v1(1690,1079.45) 1718.11,1051.34 v1(1718.11,921.34) 1718.11,866.34 1745,839.45 C14.2@1785,839.45 v1(1785,789.45) 1820,754.45 1895,754.45 ; C16.2@2025,1239.45 v1(2025,1284.45) ; C18.2@2110,1123.58 2154.13,1123.58 v1(2165,1134.45) 2220,1079.45 2220,1019.45 v1(2278.74,960.71) ; R3.2@2150,379.45 R4.2@2150,459.45 ; v1(2172.2,901.65) 2170,899.45 C15.2@2120.87,899.45 2135,885.31 2135,834.45 2108.43,807.87 v1(2023.43,807.87) 1970,754.45 1895,754.45 ; v1(2200,424.45) 2185,424.45 R4.2@2150,459.45 ; C28.1@2770,570.31 2770.87,570.31 v1(2820,619.45) ; v1(2780,89.45) 2780,439.45 v1(2785,444.45) ; v1(3130,89.45) 3130,269.45 3250,389.45 v1(3250,434.45) ; v1(3135,824.45) 3135,839.88 R16.2@3154.57,859.45 3125,859.45 3080,904.45 3080,1074.45 3155,1149.45 3155,1244.45 P1.7@3160,1249.45 3110,1299.45 3010,1299.45 P1.4@2960,1349.45 2960,1389.45 3190,1619.45 v1(3315,1619.45) ; C33.1@3235,569.45 3235.87,569.45 v1(3285,618.58) v1@3285,809.45 ; v1(3290,1884.45) 3369.57,1884.45 R5.2@3370,1884.02 R2.2@3370,1805.31 ; 1895,754.45 1895,644.45 1921.61,617.83 U6.8@2132.4,617.83 2181.61,617.83 2200,599.45 2200,509.45 R4.2@2150,459.45
  Bottom Layer w30: v1(660,159.45) 600,219.45 v1(600,327.52) U1.4@721.06,327.52 ; v1(835,854.45) v1(1060,854.45) ; v1(1200,1414.45) v1(1200,1094.45) 1305,1094.45 1380,1169.45 1676.22,1169.45 v1(1688.11,1157.56)
  other v1: 3290,814.45
VCC5V: C1.2 C23.1 DN1.COM J2.1 J4.9 J9.1 K1.COIL1 K2.COIL1 P2.1 U1.1 U3.10 U5.14 U8.10 W3.2 W6.2 W11.3 | length 13304.8
  Top Layer w12: 430,2164.45 790,2164.45 v1(925,2029.45) ; v1(3370,500.55) 3370,554.45 3400,584.45 3400,889.45 3495,984.45 v1(3970,984.45)
  Top Layer w30: v1(570,604.45) 270,604.45 75,799.45 75,1959.45 105,1989.45 300,1989.45 430,2119.45 430,2164.45 430,2349.45 485,2404.45 1522.36,2404.45 J4.9@1647.36,2279.45 ; v1(1030,609.45) 1115.39,694.84 C1.2@1115.39,719.45 ; W3.2@1630,2044.45 1695,2044.45 ; K2.COIL1@2595,1939.45 2490,1939.45 2395,2034.45 2140,2034.45 2080,1974.45 K1.COIL1@2080,1939.45 1980,1939.45 1875,2044.45 1695,2044.45 ; v1(4160,2059.45) 4240,2139.45 4240,2364.45 4155,2449.45 3400,2449.45 3360,2409.45 2970,2409.45 2870,2309.45 J9.1@2870,2279.45 2750,2399.45 1767.36,2399.45 J4.9@1647.36,2279.45 ; J4.9@1647.36,2279.45 1700,2226.81 1700,2049.45 1695,2044.45
  Bottom Layer w12: U3.10@910,2124.45 910,2044.45 v1(925,2029.45) ; U5.14@3978.11,2143.27 4063.39,2143.27 C23.1@4084.57,2164.45 ; DN1.COM@4037.24,1489.45 4085,1489.45
  Bottom Layer w20: U8.10@2865,2155.39 2865,2274.45 J9.1@2870,2279.45
  Bottom Layer w30: J2.1@479.37,939.45 570,848.82 v1(570,604.45) 570,588.31 630,528.31 U1.1@721.06,528.31 948.86,528.31 v1(1030,609.45) ; K2.COIL1@2595,1939.45 2595,1819.45 W6.2@2605,1809.45 ; P2.1@3970,414.45 3970,1099.45 3915.43,1154.02 3915.43,1319.88 4085,1489.45 4235,1639.45 4235,1989.45 4084.57,2139.88 C23.1@4084.57,2164.45
pads on no net: DN1.A J2.3 J5.MH3 J5.MH4 J5.P4 J5.P5 J6.MH1 J6.MH2 SW1.3 U1.6 U2.2 U2.5 U2.6 U2.51 U2.52 U2.53 U2.55 U2.101 U2.102 U5.1 U5.8 U5.13 U6.7 U7.7 U7.8 U7.9 U7.10 U8.5 U8.6 U8.13 U8.14 U9.7 U9.8 U9.9 U9.10 U10.1 U10.2 U10.3

## Polygon pours and split planes (outlines as drawn)
GND on Bottom Layer "BottomLayer-GND" (hatched 90Degree grid 10 track 10, remove dead copper, pour order 1000): 5,24.45 5,2529.45 4385,2529.45 4385,24.45
GND on Top Layer "Top Layer-GND" (hatched 90Degree grid 10 track 10, remove dead copper, pour order 1001): 5,24.45 5,2529.45 4385,2529.45 4385,24.45

## Keep-outs
Keep-Out Layer:
  the board outline again, w10

## Other copper
Top Layer:
  pour cut-out: 1570,2539.45 1570,1804.45 2265,1804.45 2330,1739.45 2745,1739.45 2875,1869.45 2875,2069.45 2775,2169.45 2775,2539.45
Bottom Layer:
  pour cut-out: 1570,2539.45 1570,1804.45 2265,1804.45 2330,1739.45 2745,1739.45 2875,1869.45 2875,2069.45 2775,2169.45 2775,2539.45

## Silkscreen, mask and mechanical layers (free items; w line width, h text height)
Top Overlay:
  text "COM 5V" at 2805,2204.45 h30 r270
  text "IR OUT" at 2870,2204.45 h25 r270
  text "IR OUT" at 2935,2204.45 h25 r270
  text "IR OUT" at 3405,2204.45 h25 r270
  text "IR OUT" at 3440,2204.45 h25 r270
  text "IR OUT" at 3480,2204.45 h25 r270
  text "5V->NO" at 1510,2189.45 h35 r270
  text "LED0" at 840,2184.45 h30 r270
  text "LED1" at 895,2184.45 h30 r270
  text "LED2" at 945,2184.45 h30 r270
  text "LED3" at 995,2184.45 h30 r270
  text "LED4" at 1040,2184.45 h30 r270
  text "LED5" at 1085,2184.45 h30 r270
  text "LED6" at 1130,2184.45 h30 r270
  text "LED7" at 1175,2184.45 h30 r270
  text "COM 5V" at 1220,2184.45 h30 r270
  text "PanCon" at 4320,2120 h60 r90
  text "USER_BTN" at 340,2109.45 h30
  text "A_OUT/TX-" at 3560,1890 h35 r90
  text "A_IN/TX+" at 4240,1880 h35 r90
  text "NC" at 1740,1874.45 h35 r270
  text "REL0" at 1785,1874.45 h35 r270
  text "NO" at 1825,1874.45 h35 r270
  text "NC" at 2185,1864.45 h35 r270
  text "REL1" at 2230,1864.45 h35 r270
  text "NO" at 2275,1864.45 h35 r270
  text "GND->NC" at 1465,1799.45 h35
  text "Ethernet" at 810,1734.45 h60
  text "RX+ TX+" at 4043,1731 h35 r330
  text "GND->NC" at 2315,1694.45 h35
  text "5V->NO" at 2560,1694.45 h35
  text "Diapro Kft." at 985,1589.45 h60
  text "RX- TX-" at 3540,1579 h35 r30
  text "EtherIOv3_1" at 990,1499.45 h60
  text "www.diapro.hu" at 990,1399.45 h60
  text "RST" at 3280,999.45 h30
  text "B-/VCC5V" at 3380,817.45 h35 r270
  text "B+/U0RX" at 3470,817.45 h35 r270
  text "A-/U0TX" at 3560,817.45 h35 r270
  text "A+/SCL" at 3655,812.45 h35 r270
  text "A_OUT/SDA" at 3750,812.45 h35 r270
  text "A_IN/GND" at 3845,812.45 h35 r270
  text "5V IN" at 645,799.45 h60 r90
  text "IR" at 4175,799.45 h60
  text "Ext." at 4110,374.45 h60 r90
  text "COM GND" at 930,354.45 h30 r90
  text "BTN0" at 1075,354.45 h30 r90
  text "BTN1" at 1212.8,354.45 h30 r90
  text "BTN2" at 1350.59,354.45 h30 r90
  text "BTN3" at 1488.39,354.45 h30 r90
  text "BTN4" at 1626.18,354.45 h30 r90
  text "BTN5" at 1763.98,354.45 h30 r90
  text "BTN6" at 1901.77,354.45 h30 r90
  text "BTN7" at 2032.8,354.49 h30 r90
  text "0_RX" at 2255.08,348.43 h25
  text "0_TX" at 2392.87,348.43 h25
  text "GND" at 2530.67,348.43 h25
  text "1_RX" at 2668.46,348.43 h25
  text "1_TX" at 2806.26,348.43 h25
  text "GND" at 2944.05,348.43 h25

## Text inside footprints (layer, text, board x,y; h text height)
C24: Top Overlay "+" at 3736.54,1299.13 h39.37 r180
P1: Top Overlay "2" at 2773.4,1319.92 h59.06; Top Overlay "1" at 2793.08,1219.92 h59.06; Top Overlay "10" at 3307.24,1319.92 h59.06; Top Overlay "9" at 3307.24,1219.92 h59.06